# Altium PCB KMX62.PcbDoc
Units mil, origin at the board's own origin, x right, y up, seen from the top; angles counter-clockwise.
Board outline 590 x 440 mil, 2 copper layers (Top Layer, Bottom Layer); 8 components, 7 nets, 37 pads, 3 vias.
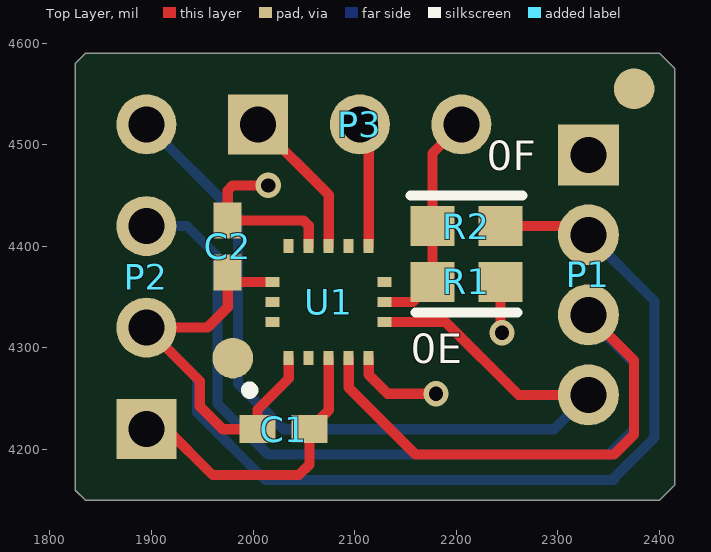
[diagram p0: Top Layer view]
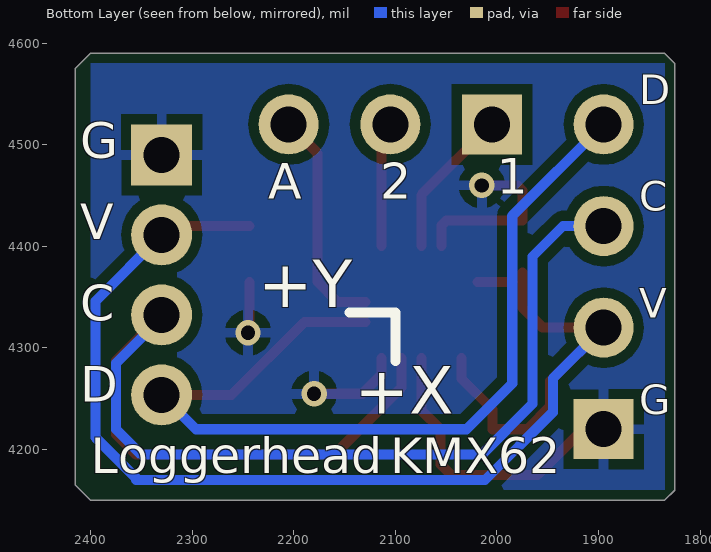
[diagram p1: Bottom Layer view, seen from below]

## Layer stack, top to bottom
Top Solder: solder mask 0.4, Solder Resist, Dk 3.5
Top Layer: signal copper 1.4
Dielectric 1: dielectric 12.6, FR-4, Dk 4.8
Bottom Layer: signal copper 1.4
Bottom Solder: solder mask 0.4, Solder Resist, Dk 3.5

## Board outline
1835,4150 1825,4160 1825,4580 1835,4590 2400,4590 2415,4575 2415,4165 2400,4150

## Design rules (kind name [scope] priority, off if disabled: settings)
Clearance [All] p1: gap=10
PolygonConnect [All] p1: connectstyle=Relief reliefconductorwidth=10 reliefentries=4 polygonreliefangle="90 Angle" airgapwidth=10
RoutingVias [All] p1: holewidth=28 width=50 viastyle="Through Hole" minholewidth=28 minwidth=50 maxholewidth=28 maxwidth=50
SolderMaskExpansion [All] p1: expansion=4
Width [All] p1: maxlimit=10 minlimit=10 preferedwidth=10
29 further rules are at their usual default settings.

## Components (designator, comment, footprint, x,y, rotation, side; value= is the part's Value field where it differs from the comment)
C1 "0.1 uF" 0402 2030,4220 r180 top
C2 "0.1 uF" 0402 1975,4400 r270 top
P1 "HDR_4x1_2mm" Hdr_4x1_2mm 2330,4490 r180 top
P2 "Header 4" HDR1X4 1895,4220 r90 top
P3 "Header 3" HDR1X3 2005,4520 r0 top
R1 "short" 3-0603 2210,4365 r180 top
R2 "short" 3-0603 2210,4420 r180 top
U1 "KMX62" Kionix_3x3_LGA16 2035,4290 r0 top

## Footprints (in the part's own frame and the unit in brackets; to place one, negate y for a bottom-side part, rotate by r counter-clockwise, add the part's x,y. Pads: shape width x height; smd on the part's side, far side on the other; paste and mask are expansions set on the pad)
3-0603 [mm] "Chip Resistor; Body 1.6 x 0.9 mm (LxW typ)"
  rect 1.1x1 smd: 1(-0.85,0) 2(0.85,0)
0402 [mm] "Chip Capacitor; Body 1.0 x 0.5 mm (LxW typ)"
  rect 0.9x0.7 smd: 1(-0.65,0) 2(0.65,0)
HDR1X3 [mm] "Connector; Header; 3 Position"
  rect 1.5x1.5 hole 0.9: 1(0,0)
  round 1.5 hole 0.9: 2(2.54,0) 3(5.08,0)
HDR1X4 [mm] "Connector; Header; 4 Position"
  rect 1.5x1.5 hole 0.9: 1(0,0)
  round 1.5 hole 0.9: 2(2.54,0) 3(5.08,0) 4(7.62,0)
Hdr_4x1_2mm [mil]
  rect 60x60 hole 35.43: 1(0,0)
  round 60 hole 35.43: 2(0,78.74) 3(0,157.48) 4(0,236.22)
Kionix_3x3_LGA16 [mm]
  rect 0.25x0.35 smd: 1(0,0) 2(0.5,0) 3(1,0) 4(1.5,0) 5(2,0) 9(2,2.8) 10(1.5,2.8) 11(1,2.8) 12(0.5,2.8) 13(0,2.8)
  rect 0.35x0.25 smd: 6(2.4,0.9) 7(2.4,1.4) 8(2.4,1.9) 14(-0.4,1.9) 15(-0.4,1.4) 16(-0.4,0.9)
  silkscreen extent -1.06,-0.89 -0.88,-0.71

## Part data
C1 C2: library part C0402, "Ceramic Chip Capacitor - Standard"
P2: "Header, 4-Pin"
P3: "Header, 3-Pin"
R1 R2: library part ERJ3RK, "Precision Thick Film Chip Resistor, 10 Ohm to 1M Ohm Range, 1% and 0.5% Tolerance, 0603 Size, 0.063 W"
U1: "Kionix Accel/Mag"

## Free pads (board coordinates)
  round 40 smd paste-20 mask+5: 0(1980,4290) 0(2375,4555)

## Via types
v1: diameter 25, hole 14, Top Layer to Bottom Layer, 3 vias

## Nets (pads, with @x,y where several pads share a name; then routed paths per layer and width w, separated by ;. In a path a pad name is that pad's centre, name@x,y a point inside that pad or via, vN(x,y) a via of type N, cw(c..) or ccw(c..) an arc to the next point about the centre after c; other vN are vias at no path point)
ADDR: P3.3 R1.2 R2.2 U1.7 | length 222.1
  Top Layer w10: U1.7 2156.65,4345.12 R1.2 R2.2 2176.54,4491.54 P3.3
GND: C1.1 C2.1 P1.1 P2.1 R1.1 U1.3 U1.5 U1.12 | length 608
  Top Layer w10: P2.1 1915,4220 1960,4175 2045,4175 2055.59,4185.59 C1.1 2074.37,4238.78 U1.3 ; v1(2015,4460) 1980,4460 1975,4455 C2.1 2049.41,4425.59 2054.68,4420.31 U1.12 ; U1.5 2113.74,4273.74 2132.48,4255 v1(2180,4255) ; v1@2243.46,4316.54 R1.1
  other v1: 2245,4315
GPIO1: P3.1 U1.11 | length 148.5
  Top Layer w10: P3.1 2074.37,4450.63 U1.11
GPIO2: P3.2 U1.9 | length 111
  Top Layer w10: U1.9 P3.2@2113.74,4511.26
SCL: P1.3 P2.3 U1.4 | length 1281.4
  Top Layer w10: U1.4 2094.05,4260.94 2160,4195 2355,4195 2375,4215 2375,4287.52 P1.3
  Bottom Layer w10: P2.3 1935,4420 1965,4390 1965,4245 2015,4195 2350,4195 2375,4220 2375,4285 2330,4330 P1.3
SDA: P1.4 P2.4 U1.6 | length 900.1
  Top Layer w10: U1.6 2189.57,4325.43 2261.22,4253.78 P1.4
  Bottom Layer w10: P2.4 1985,4430 1985,4265 2030,4220 2296.22,4220 P1.4
VCC: C1.2 C2.2 P1.2 P2.2 R2.1 U1.1 U1.14 | length 1322
  Top Layer w10: C2.2 1975,4340 1955,4320 P2.2 1947.5,4267.5 1947.5,4242.5 1970,4220 C1.2 2004.41,4239.41 2035,4270 U1.1 ; C2.2@1984.61,4364.8 U1.14 ; R2.1 2321.26,4420 P1.2
  Bottom Layer w10: P2.2 1945,4270 1945,4236.72 2011.72,4170 2355,4170 2355,4171.72 2395,4211.72 2395,4346.26 P1.2
pads on no net: U1.2 U1.8 U1.10 U1.13 U1.15 U1.16

## Polygon pours and split planes (outlines as drawn)
GND on Bottom Layer "Mechanical 1-No Net" (solid, pour order 2): 1835,4580 2400,4580 2400,4155 2394.77,4160.31 1835,4160.31

## Silkscreen, mask and mechanical layers (free items; w line width, h text height)
Top Overlay:
  lines w10: 2155,4450 2265,4450 ; 2160,4335 2260,4335
  text "0F" at 2230,4465 h50
  text "0E" at 2155,4275 h50
Bottom Overlay:
  lines w10: 2100,4287 2100,4335 2145,4335
  text "D" at 1860,4530 h50
  text "G" at 2410,4475 h60
  text "1" at 2000,4440 h60
  text "2" at 2115,4435 h60
  text "A" at 2225,4435 h60
  text "C" at 1860,4425 h50
  text "V" at 2410,4395 h60
  text "+Y" at 2235,4325 h80
  text "V" at 1860,4320 h50
  text "C" at 2410,4315 h60
  text "D" at 2410,4235 h60
  text "G" at 1860,4225 h50
  text "+X" at 2140,4220 h80
  text "KMX62" at 2105,4165 h60
  text "Loggerhead" at 2400,4165 h60
Mechanical 1:
  the board outline again, w10